# EAGLE board PwrGenBrd_v4 (EAGLE 7.6.0)
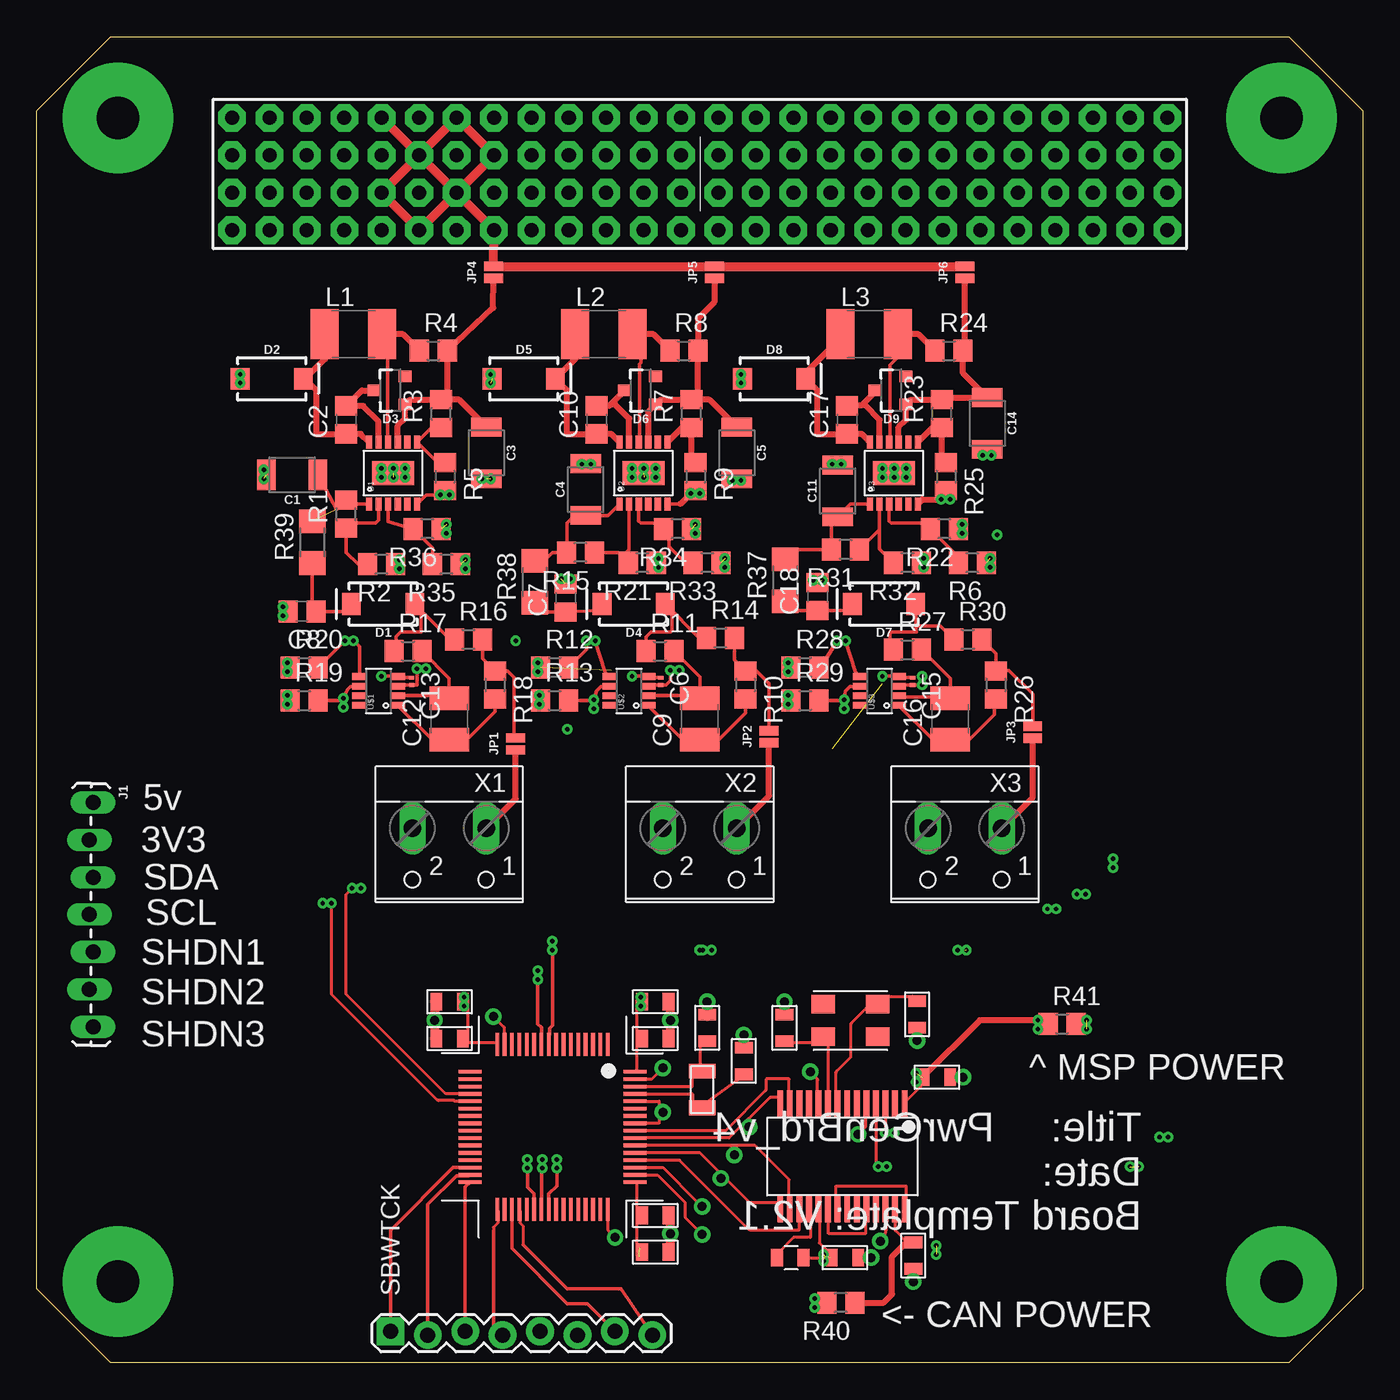
[diagram p0: board, top side]
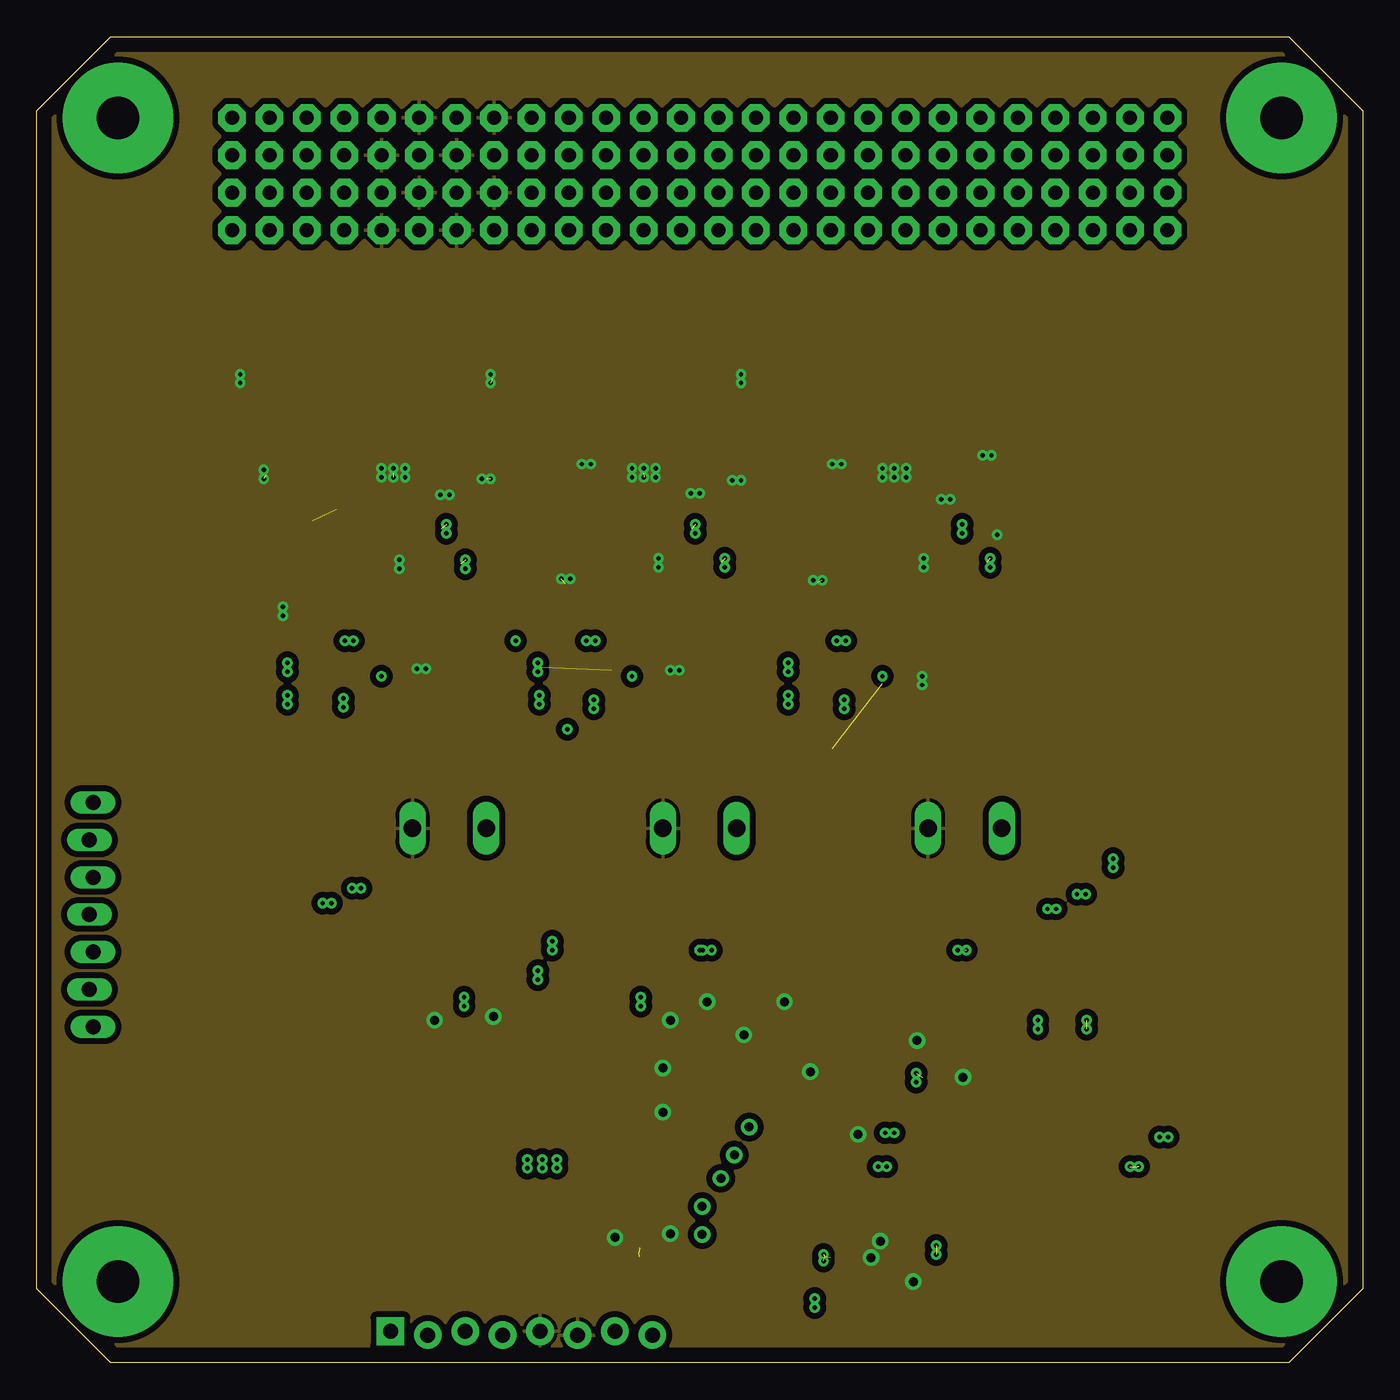
[diagram p1: board, inner layer GND]
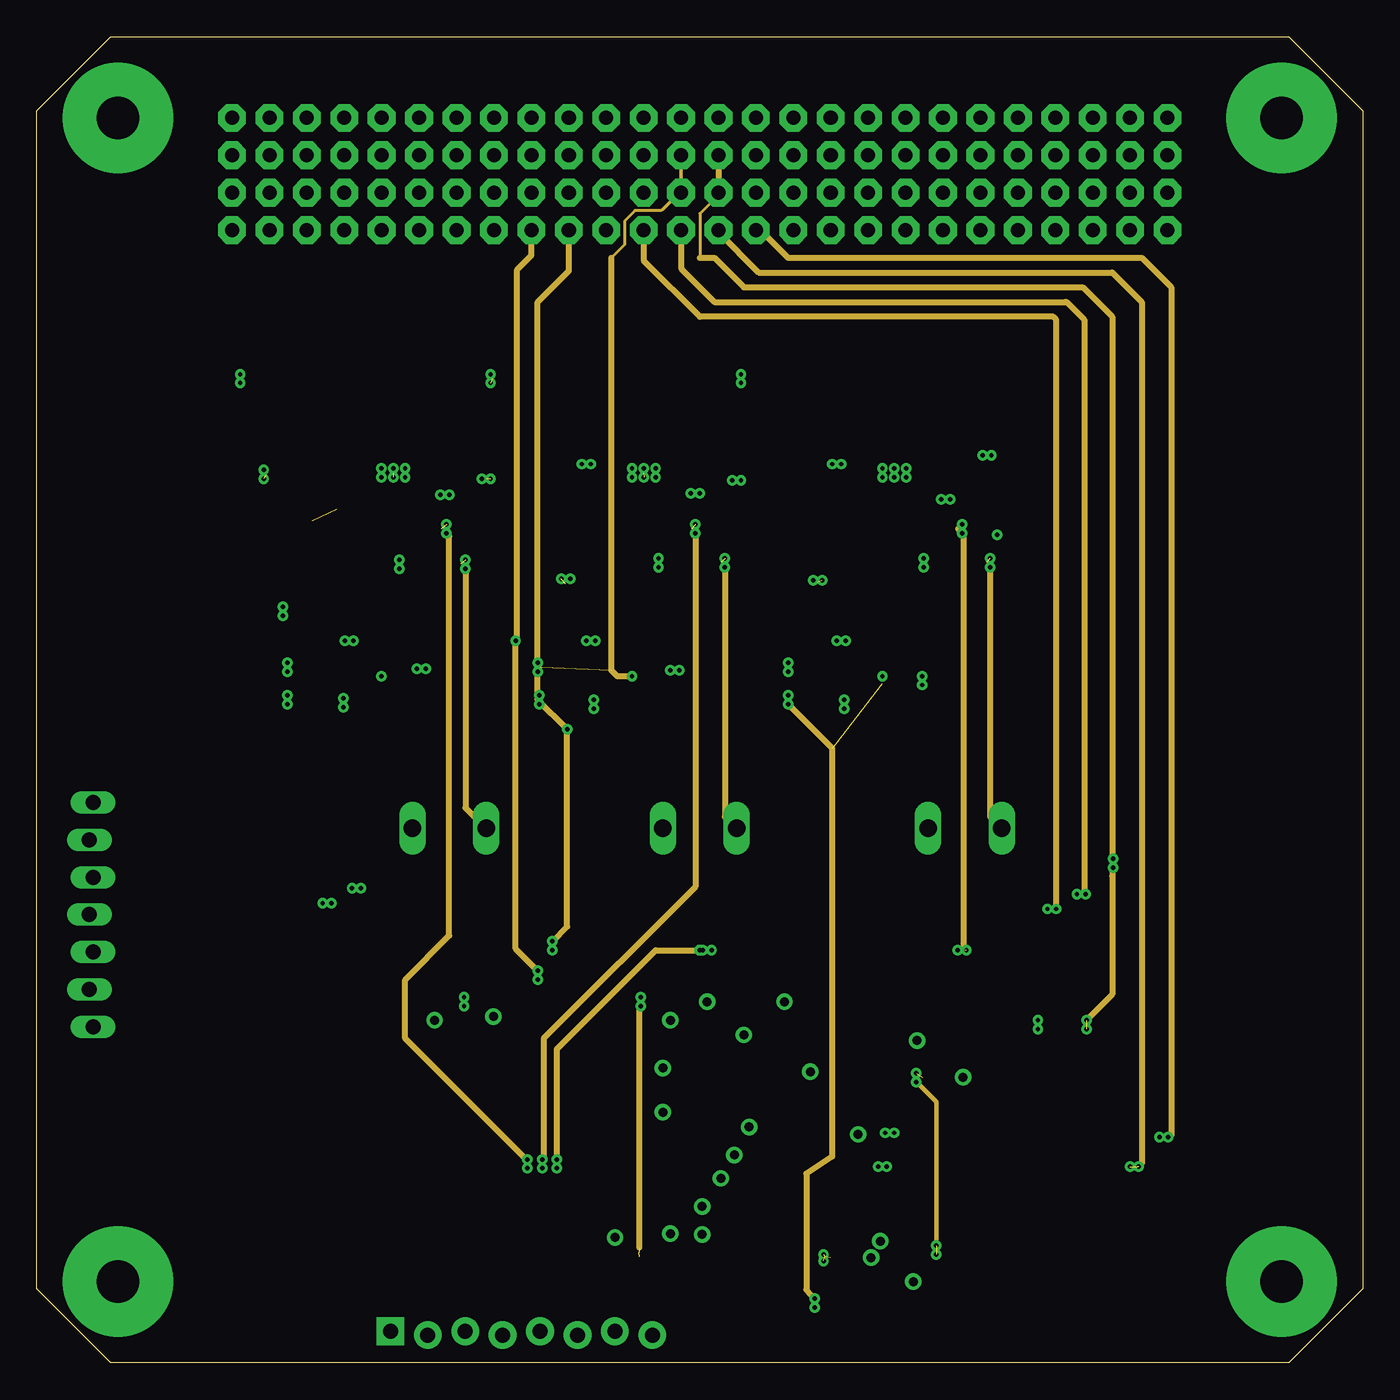
[diagram p2: board, inner layer TBD]
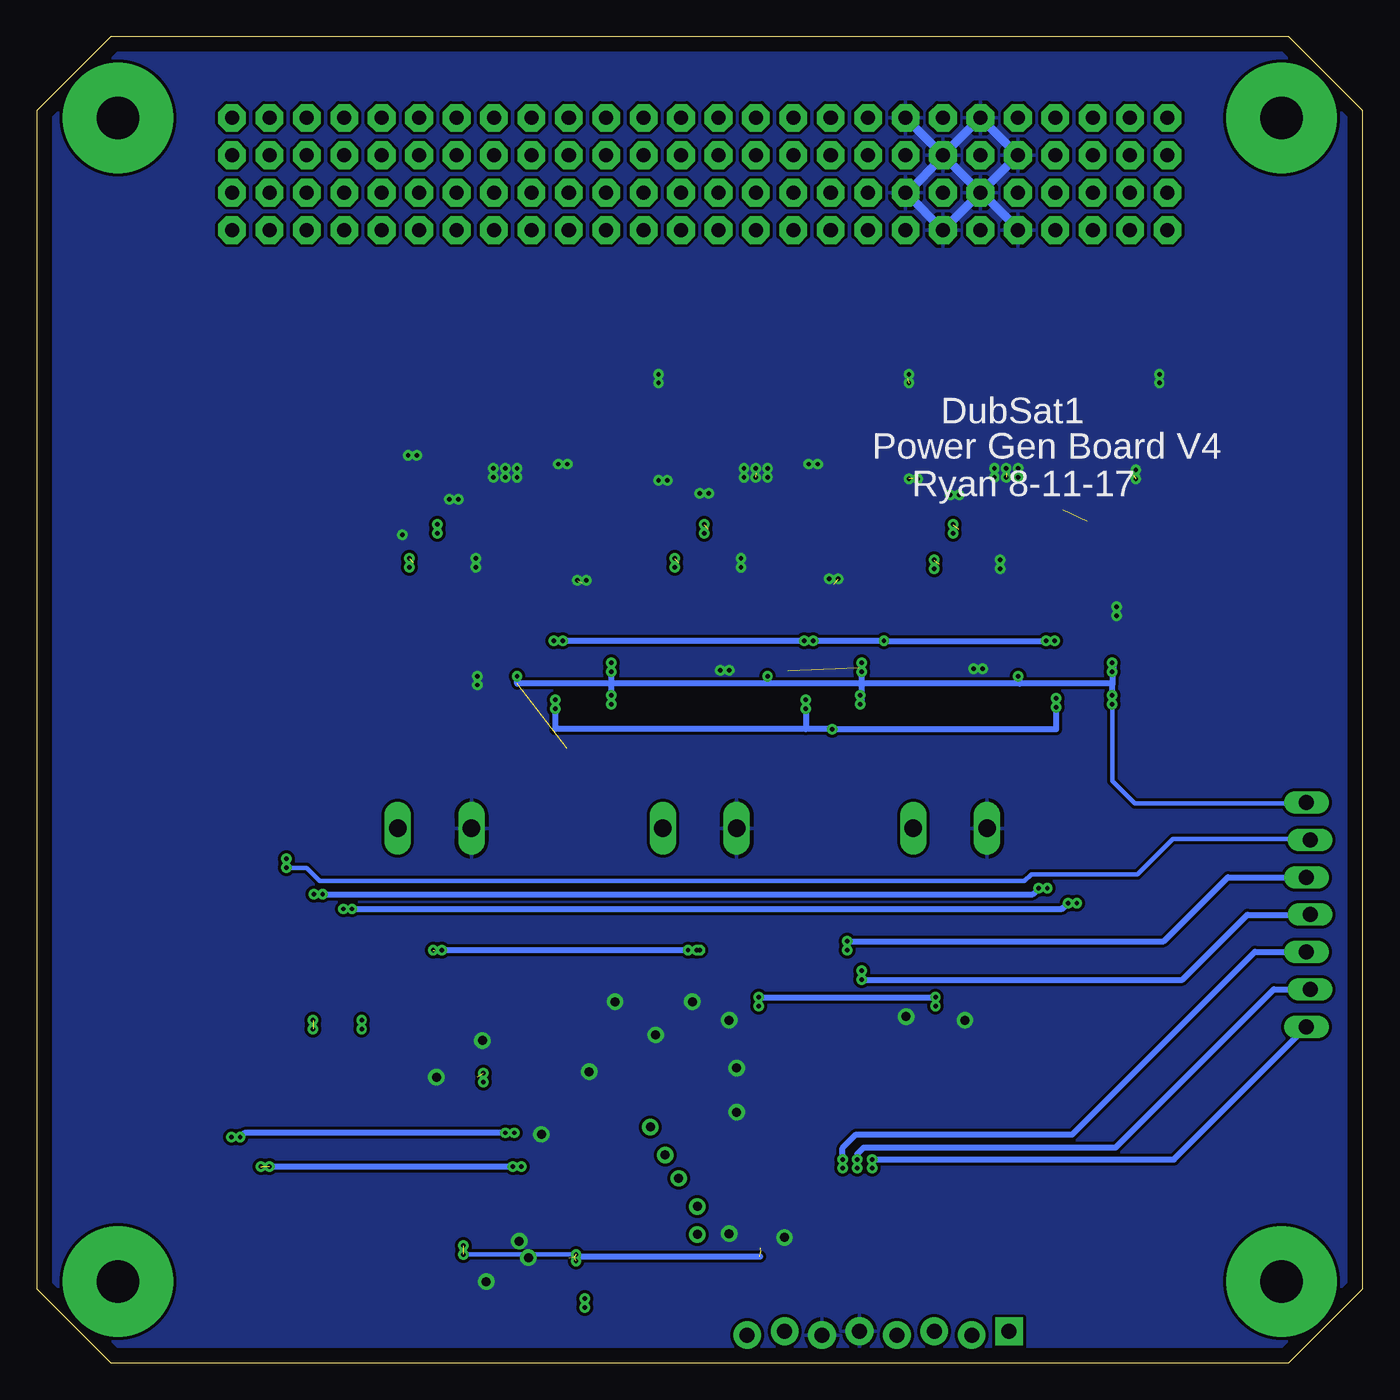
[diagram p3: board, bottom side, seen from below]

Size 90 x 90 mm. Coordinates in mm from the lower left corner, seen from the top.
Copper layers (1*2*3*16): Top 0.035mm / dielectric 1.5mm / GND 0.035mm / dielectric 0.15mm / TBD 0.035mm / dielectric 0.2mm / Bottom 0.035mm
Design rules "default *": minimum track width 10mil, minimum drill 24mil, track to track 8mil, track to pad 8mil, pad to pad 8mil, via to via 8mil, smd to smd 8mil, copper to edge 40mil, drill to drill 8mil, minimum pad ring 10mil, minimum via ring 8mil, stop-mask expansion 4mil, vias tented up to drill 0mil, thermal gap 10mil

## Footprints (pad centres in the part's own frame; a part is rotated, then mirrored left to right if it is on the bottom)
1210 = smd 1.27 x 2.06: 1 -1.755,0; 2 1.755,0
C0805 = smd 1.3 x 1.5: 1 -0.95,0; 2 0.95,0
C0201 = smd 0.25 x 0.35: 1 -0.25,0; 2 0.25,0
C1210 = smd 1.6 x 2.7: 1 -1.4,0; 2 1.4,0
SMA-DIODE = smd 1.27 x 1.47: A -2.15,0; C 2.15,0
SOT23-3 = smd 0.8 x 0.9: 1 -0.95,-1; 2 0.95,-1; 3 0,1.1
1X07_LOCK_LONGPADS = drill 1.016 long: 1 0,0.127; 2 2.54,-0.127; 3 5.08,0.127; 4 7.62,-0.127; 5 10.16,0.127; 6 12.7,-0.127; 7 15.24,0.127
SMT-JUMPER_2_NO_NO-SILK = smd 0.635 x 1.27: 1 -0.406,0; 2 0.406,0
L1812 = smd 1.9 x 3.4: 1 -1.95,0; 2 1.95,0
R0805 = smd 1.3 x 1.5: 1 -0.95,0; 2 0.95,0
R1206 = smd 1.6 x 1.803: 1 -1.422,0; 2 1.422,0
MSOP-12_GND = smd 0.889 x 0.42: 1 -2.1,1.625; 2 -2.1,0.975; 3 -2.1,0.325; 4 -2.1,-0.325; 5 -2.1,-0.975; 6 -2.1,-1.625; 7 2.1,-1.625; 8 2.1,-0.975; 9 2.1,-0.325; 10 2.1,0.325; 11 2.1,0.975; 12 2.1,1.625 | smd 1.651 x 2.845: 13 0,0
SO08 = smd 0.45 x 1: 1 -0.975,-1.3; 2 -0.325,-1.3; 3 0.325,-1.3; 4 0.975,-1.3; 5 0.975,1.3; 6 0.325,1.3; 7 -0.325,1.3; 8 -0.975,1.3
PC104_CONNECTOR = drill 0.953 pad 1.88 octagon: P$1 -31.75,31.88; P$2 -31.75,34.42; P$3 -31.75,36.96; P$4 -31.75,39.5; P$5 -29.21,31.88; P$6 -29.21,34.42; P$7 -29.21,36.96; P$8 -29.21,39.5; P$9 -26.67,31.88; P$10 -26.67,34.42; P$11 -26.67,36.96; P$12 -26.67,39.5; P$13 -24.13,31.88; P$14 -24.13,34.42; P$15 -24.13,36.96; P$16 -24.13,39.5; P$17 -21.59,31.88; P$18 -21.59,34.42; P$19 -21.59,36.96; P$20 -21.59,39.5; P$21 -19.05,31.88; P$22 -19.05,34.42; P$23 -19.05,36.96; P$24 -19.05,39.5; P$25 -16.51,31.88; P$26 -16.51,34.42; P$27 -16.51,36.96; P$28 -16.51,39.5; P$29 -13.97,31.88; P$30 -13.97,34.42; P$31 -13.97,36.96; P$32 -13.97,39.5; P$33 -11.43,31.88; P$34 -11.43,34.42; P$35 -11.43,36.96; P$36 -11.43,39.5; P$37 -8.89,31.88; P$38 -8.89,34.42; P$39 -8.89,36.96; P$40 -8.89,39.5; P$41 -6.35,31.88; P$42 -6.35,34.42; P$43 -6.35,36.96; P$44 -6.35,39.5; P$45 -3.81,31.88; P$46 -3.81,34.42; P$47 -3.81,36.96; P$48 -3.81,39.5; P$49 -1.27,31.88; P$50 -1.27,34.42; P$51 -1.27,36.96; P$52 -1.27,39.5; P$53 1.27,31.88; P$54 1.27,34.42; P$55 1.27,36.96; P$56 1.27,39.5; P$57 3.81,31.88; P$58 3.81,34.42; P$59 3.81,36.96; P$60 3.81,39.5; P$61 6.35,31.88; P$62 6.35,34.42; P$63 6.35,36.96; P$64 6.35,39.5; P$65 8.89,31.88; P$66 8.89,34.42; P$67 8.89,36.96; P$68 8.89,39.5; P$69 11.43,31.88; P$70 11.43,34.42; P$71 11.43,36.96; P$72 11.43,39.5; P$73 13.97,31.88; P$74 13.97,34.42; P$75 13.97,36.96; P$76 13.97,39.5; P$77 16.51,31.88; P$78 16.51,34.42; P$79 16.51,36.96; P$80 16.51,39.5; P$81 19.05,31.88; P$82 19.05,34.42; P$83 19.05,36.96; P$84 19.05,39.5; P$85 21.59,31.88; P$86 21.59,34.42; P$87 21.59,36.96; P$88 21.59,39.5; P$89 24.13,31.88; P$90 24.13,34.42; P$91 24.13,36.96; P$92 24.13,39.5; P$93 26.67,31.88; P$94 26.67,34.42; P$95 26.67,36.96; P$96 26.67,39.5; P$97 29.21,31.88; P$98 29.21,34.42; P$99 29.21,36.96; P$100 29.21,39.5; P$101 31.75,31.88; P$102 31.75,34.42; P$103 31.75,36.96; P$104 31.75,39.5
MSP-CAN_BLOCK = smd 1.2 x 0.8: 1 -6,6.08; 2 -6,7.88; 3 -8.5,6.08; 4 -8.5,7.88; 9 -8.5,-6.08; 10 -8.5,-7.88; 11 -6,-6.08; 12 -6,-7.88; 13 8.5,6.08; 14 8.5,7.88; 15 6,6.08; 16 6,7.88; 23 8.875,18.955; 24 8.875,20.755; 25 8.875,17.045; 26 8.875,15.245; 27 -3.375,25.205; 28 -3.375,27.005 | smd 1 x 0.25: 3.3V@CAN1 -3.375,25.125; 3.3V@CAN2 8.875,18.875; 3.3V@MSP1 8.501,5.884; 3.3V@MSP2 -8.533,-5.962; 3.3V_ANALOG@MSP2 -8.482,5.904 | smd 0.8 x 1.2: 5 -5.83,10.5; 6 -7.63,10.5; 7 -3.58,13; 8 -5.38,13; 17 -8.545,24.75; 18 -6.745,24.75; 19 -5.83,15.75; 20 -7.63,15.75; 21 7.83,24.5; 22 9.63,24.5 | smd 0.25 x 1: 5V 7.65,24.5 | smd 1.75 x 0.4: CANH -1.6,21.96; CANL -1.6,22.61; P$65 -1.6,23.91; P$66 -1.6,23.26; P$69 -1.6,21.31; P$70 -1.6,20.66; P$71 -1.6,20.01; P$72 -1.6,19.36; P$73 -1.6,18.71; P$74 -1.6,18.06; P$75 -1.6,17.41; P$76 -1.6,16.76; P$77 -1.6,16.11; P$78 -1.6,15.46; P$79 5.6,15.46; P$80 5.6,16.11; P$81 5.6,16.76; P$82 5.6,17.41; P$83 5.6,18.06; P$84 5.6,18.71; P$85 5.6,19.36; P$86 5.6,20.01; P$87 5.6,20.66; P$88 5.6,21.31; P$89 5.6,21.96; P$90 5.6,22.61; P$91 5.6,23.26; P$92 5.6,23.91 | drill 0.61: GND@1 -3.375,27.875; GND@2 -5.875,24.75; GND@3 -3.75,17.5; GND@4 0.5,20.75; GND@5 -8.5,15.75; GND@7 -8.5,10.5; GND@8 -7.25,8; GND@9 -4,7.5; GND@10 -1,7.5; GND@11 7.75,22.25; GND@12 10.5,24.5; GND@13 8.875,21.625; GND@14 7.25,8; GND@15 7.5,4.25; GND@16 -7.5,-4; GND@17 -7.25,-8; GND@26 -6.25,13; P2.4_SPI-CS2 5.397,10.16; P2.7_SPI-CS3 7.303,10.16; P5.4_SPI-MOSI 3.487,11.434; P5.5_SPI-MISO 1.9,12.354; P5.6_SPI-CLK 0,13.348 | smd 1.55 x 0.25: P1.0_A0 -5.6,3.75; P1.1_A1 -5.6,3.25; P1.2_A2 -5.6,2.75; P1.3_A3 -5.6,-1.75; P1.4_A4 -5.6,-2.25; P1.5_A5 -5.6,-2.75; P1.6_GPIO/PWM 5.6,-0.75; P1.7_GPIO/PWM 5.6,-0.25; P2.1_RXD 5.6,-3.75; P2.2_GPIO/PWM 5.6,-3.25; P3.0_A12 -5.6,2.25; P3.1_A13 -5.6,1.75; P3.2_A14 -5.6,1.25; P3.3_A15 -5.6,0.75; P3.4_GPIO_DEBUG 5.6,-2.75; P3.5_GPIO_DEBUG 5.6,-2.25; P3.6_GPIO/PWM 5.6,-1.75; P3.7_GPIO/PWM 5.6,-1.25; P5.0_I2C-SDA-1 5.6,0.25; P5.1_I2C-SCL-1 5.6,0.75; P7.0_I2C-SDA-2 -5.6,-0.25; P7.1_I2C-SCL-2 -5.6,-0.75; P$8 -5.6,0.25; P$11 -5.6,-1.25; P$15 -5.6,-3.25; P$16 -5.6,-3.75; P$43 5.6,1.25; P$44 5.6,1.75; P$45 5.6,2.25; P$46 5.6,2.75; P$47 5.6,3.25; P$48 5.6,3.75 | smd 0.25 x 1.55: P2.0_TXD 3.75,-5.6; P2.5_GPIO 1.75,-5.6; P2.6_GPIO/PWM 2.25,-5.6; P4.0_GPIO -0.25,-5.6; P4.1_GPIO 0.25,-5.6; P4.2_GPIO 0.75,-5.6; P4.3_GPIO 1.25,-5.6; P7.2_SYNC1 -1.75,-5.6; P7.3_GPIO -1.25,-5.6; P7.4_GPIO -0.75,-5.6; P$17 -3.75,-5.6; P$18 -3.25,-5.6; P$19 -2.75,-5.6; P$49 3.75,5.6; P$50 3.25,5.6; P$51 2.75,5.6; P$52 2.25,5.6; P$53 1.75,5.6; P$54 1.25,5.6; P$55 0.75,5.6; P$56 0.25,5.6; P$57 -0.25,5.6; P$58 -0.75,5.6; P$59 -1.25,5.6; P$60 -1.75,5.6; P$61 -2.25,5.6; P$62 -2.75,5.6; P$63 -3.25,5.6; P$64 -3.75,5.6; PJ.3_SYNC2 -2.25,-5.6; SBWTCK 2.75,-5.6; SBWTDIO 3.25,-5.6 | smd 1 x 1.8: P$93 -3.79,10.16; P$94 -1.29,10.16 | smd 1.25 x 1.6: P$104 -6.13,18.38; P$105 -6.13,22.08; P$106 -8.33,22.08; P$107 -8.33,18.38
BOARD_TEMPLATE_(V2.1) = drill 2.9 pad 7.5: P$1 -39.5,39.5; P$2 -39.5,-39.5; P$3 39.5,-39.5; P$4 39.5,39.5
1X08_CONNECTOR = drill 1.016 pad 1.88: 2 2.54,-0.127; 3 5.08,0.127; 4 7.62,-0.127; 5 10.16,0.127; 6 12.7,-0.127; 7 15.24,0.127; 8 17.78,-0.127 | drill 1.016 pad 1.88 square: SBWTCK 0,0.127
W237-102 = drill 1.194 long: 1 -2.5,-1.27; 2 2.5,-1.27

## Placement (x,y rotation side)
C1  10uF  [1210]  17.33,60.26 180 top
C2  1 uF  [C0805]  21,64 90 top
C3  10uF  [1210]  30.52,61.76 270 top
C4  10uF  [1210]  37.26,59.27 90 top
C5  10uF  [1210]  47.52,61.76 270 top
C6  0.1uF  [C0201]  42.35,46.25 270 top
C7  .1uF  [C0805]  35.9,51.9 90 top
C8  .1uF  [C0805]  18,51 180 top
C9  1uF  [C1210]  45,43.7 90 top
C10  1 uF  [C0805]  38,64 90 top
C11  10uF  [1210]  54.36,59.17 90 top
C12  1uF  [C1210]  28,43.7 90 top
C13  0.1uF  [C0201]  25.45,46.25 270 top
C14  10uF  [1210]  64.52,63.76 270 top
C15  0.1uF  [C0201]  59.45,46.25 270 top
C16  1uF  [C1210]  62,43.7 90 top
C17  1 uF  [C0805]  55,64 90 top
C18  .1uF  [C0805]  53,52 90 top
D1  [SMA-DIODE]  23.51,51.5 180 top
D2  [SMA-DIODE]  15.95,66.79 0 top
D3  [SOT23-3]  24,66 90 top
D4  [SMA-DIODE]  40.51,51.5 180 top
D5  [SMA-DIODE]  33.05,66.79 0 top
D6  [SOT23-3]  41,66 90 top
D7  [SMA-DIODE]  57.51,51.5 180 top
D8  [SMA-DIODE]  50.05,66.79 0 top
D9  [SOT23-3]  58,66 90 top
J1  [1X07_LOCK_LONGPADS]  3.69,38.03 270 top
JP1  JUMPER-SMT_2_NO_NO-SILK  [SMT-JUMPER_2_NO_NO-SILK]  32.5,42 90 top
JP2  JUMPER-SMT_2_NO_NO-SILK  [SMT-JUMPER_2_NO_NO-SILK]  49.7,42.5 90 top
JP3  JUMPER-SMT_2_NO_NO-SILK  [SMT-JUMPER_2_NO_NO-SILK]  67.6,42.8 90 top
JP4  JUMPER-SMT_2_NO_NO-SILK  [SMT-JUMPER_2_NO_NO-SILK]  31,74 90 top
JP5  JUMPER-SMT_2_NO_NO-SILK  [SMT-JUMPER_2_NO_NO-SILK]  46,74 90 top
JP6  JUMPER-SMT_2_NO_NO-SILK  [SMT-JUMPER_2_NO_NO-SILK]  63,74 90 top
L1  8.2uH  [L1812]  21.49,69.81 0 top
L2  8.2uH  [L1812]  38.49,69.81 0 top
L3  8.2uH  [L1812]  56.49,69.81 0 top
R1  ???k  [R0805]  21,57.6 90 top
R2  ???k  [R0805]  23.4,54.2 180 top
R3  549k  [R0805]  27.44,64.42 90 top
R4  0.05  [R0805]  26.92,68.69 0 top
R5  459k  [R0805]  27.72,60.14 270 top
R6  [R0805]  63.5,54.3 180 top
R7  549k  [R0805]  44.44,64.42 90 top
R8  0.05  [R0805]  43.92,68.69 0 top
R9  459k  [R0805]  44.72,60.14 270 top
R10  10  [R0805]  48.1,46 270 top
R11  10  [R0805]  42.3,48.3 0 top
R12  3.3k  [R0805]  35.15,47.2 0 top
R13  3.3k  [R0805]  35.15,44.95 0 top
R14  0.07  [R0805]  46.4,49.2 0 top
R15  ???k  [R0805]  36.9,55 180 top
R16  0.07  [R0805]  29.3,49.1 0 top
R17  10  [R0805]  25.2,48.3 0 top
R18  10  [R0805]  31.1,46 270 top
R19  3.3k  [R0805]  18.15,44.95 0 top
R20  3.3k  [R0805]  18.15,47.2 0 top
R21  ???k  [R0805]  41.1,54.3 180 top
R22  [R0805]  61.6,56.6 180 top
R23  549k  [R0805]  61.44,64.42 90 top
R24  0.05  [R0805]  61.92,68.69 0 top
R25  459k  [R0805]  61.72,60.14 270 top
R26  10  [R0805]  65.1,46 270 top
R27  10  [R0805]  59.1,48.4 0 top
R28  3.3k  [R0805]  52.15,47.2 0 top
R29  3.3k  [R0805]  52.15,44.95 0 top
R30  0.07  [R0805]  63.2,49.1 0 top
R31  ???k  [R0805]  54.9,55.2 180 top
R32  ???k  [R0805]  59.1,54.3 180 top
R33  [R0805]  45.5,54.3 180 top
R34  [R0805]  43.5,56.6 180 top
R35  [R0805]  27.8,54.2 180 top
R36  [R0805]  26.5,56.6 180 top
R37  Farritebead  [R1206]  50.8,53.1 90 top
R38  Ferritebead  [R1206]  33.8,53 90 top
R39  Ferritebead  [R1206]  18.7,55.7 90 top
R40  ???k  [R0805]  54.58,4.07 180 top
R41  ???k  [R0805]  69.6,22.99 0 top
U1  LT3652  [MSOP-12_GND]  24.18,60.39 90 top
U2  LT3652  [MSOP-12_GND]  41.18,60.39 90 top
U3  LT3652  [MSOP-12_GND]  58.18,60.39 90 top
U$1  INA219  [SO08]  23.2,45.6 90 top
U$2  INA219  [SO08]  40.2,45.6 90 top
U$3  INA219  [SO08]  57.2,45.6 90 top
U$4  PC104_CONNECTOR  [PC104_CONNECTOR]  45,45 0 top
U$5  MSP-CAN_BLOCK  [MSP-CAN_BLOCK]  35,16 270 top
U$6  BOARD_TEMPLATE_(V2.1)  [BOARD_TEMPLATE_(V2.1)]  45,45 0 top
U$8  PROGRAM/DEBUG_PORT  [1X08_CONNECTOR]  24,2 0 top
X1  [W237-102]  28,35 180 top
X2  [W237-102]  45,35 180 top
X3  [W237-102]  63,35 180 top

## Library data of the parts
C1 C3-C5 C11 C14 = SparkFun-Capacitors; PROD_ID: CAP-09824
C2 C6-C10 C12 C13 C15-C18 L1-L3 R1-R41 = rcl
D1 D2 D4 D5 D7 D8 = SparkFun-DiscreteSemi; PROD_ID: DIO-09886
D3 D6 D9 = SparkFun-DiscreteSemi; PROD_ID: DIO-08411
J1 = SparkFun-Connectors
JP1-JP6 = SparkFun-Jumpers
U1-U3 = SparkFun-IC-Power
U$1-U$3 = User-Submitted
U$4 U$5 U$8 = CubeSat(V2.4)
U$6 = CubeSat(V2.2)
X1-X3 = con-wago-500; MPN: 237-102; OC_FARNELL: unknown; OC_NEWARK: 70K9898

## Nets
3.3VMSP: J1.2 R41.2 U$4.P$54 U$4.P$55
3.3VMSP_MSP: R41.1 U$5.3.3V@CAN1 U$5.3.3V@CAN2 U$5.3.3V@MSP1 U$5.3.3V@MSP2 U$5.3.3V_ANALOG@MSP2
BATT: C3.1 D3.1 JP4.1 R3.2 R4.2 U1.9
BATT1: C5.1 D6.1 JP5.1 R7.2 R8.2 U2.9
BATT2: C14.1 D9.1 JP6.1 R23.2 R24.2 U3.9
BOOST: C2.2 D3.3 U1.11
BOOST1: C10.2 D6.3 U2.11
BOOST2: C17.2 D9.3 U3.11
CANH: U$4.P$53 U$5.CANH
CANL: U$4.P$57 U$5.CANL
GND: C1.2 C3.2 C4.2 C5.2 C6.2 C7.2 C8.2 C11.2 C13.2 C14.2 C15.2 C18.2 D2.A D5.A D8.A R2.1 R5.2 R9.2 R21.1 R25.2 R32.1 U1.6 U1.13 U2.6 U2.13 U3.6 U3.13 U$1.3 U$2.3 U$3.3 U$4.P$17 U$4.P$19 U$4.P$22 U$4.P$24 U$4.P$25 U$4.P$27 U$4.P$30 U$4.P$32 U$5.GND@1 U$5.GND@2 U$5.GND@3 U$5.GND@4 U$5.GND@5 U$5.GND@7 U$5.GND@8 U$5.GND@9 U$5.GND@10 U$5.GND@11 U$5.GND@12 U$5.GND@13 U$5.GND@14 U$5.GND@15 U$5.GND@16 U$5.GND@17 U$5.GND@26 U$8.5 U$8.6 X1.2 X2.2 X3.2
IN+: C12.1 R18.2 U$1.1
IN+1: C9.1 R10.2 U$2.1
IN+2: C16.1 R26.2 U$3.1
IN++: JP1.2 R16.2 R18.1
IN++1: JP2.2 R10.1 R14.2
IN++2: JP3.2 R26.1 R30.2
IN-: C12.2 R17.2 U$1.2
IN-1: C9.2 R11.2 U$2.2
IN-2: C16.2 R27.2 U$3.2
IN--: D1.A R16.1 R17.1
IN--1: D4.A R11.1 R14.1
IN--2: D7.A R27.1 R30.1
N$2: R6.2 R22.2 U3.3
N$3: U$4.P$101
N$4: U$4.P$97
N$5: U$4.P$93
N$6: U$4.P$89
N$8: U$4.P$61
N$9: U$4.P$90
N$10: U$4.P$98
N$11: U$4.P$103
N$12: U$4.P$102
N$13: U$4.P$94
N$14: U$4.P$99
N$15: U$4.P$91
N$16: U$4.P$95
N$17: U$4.P$92
N$18: U$4.P$96
N$19: U$4.P$100
N$20: U$4.P$104
N$21: C8.1 D1.C R39.1
N$22: C7.1 D4.C R38.1
N$23: R33.2 R34.2 U2.3
N$24: C18.1 D7.C R37.1
N$26: R35.2 R36.2 U1.3
P2.0TXD: U$5.P2.0_TXD U$8.3
P2.1RXD: U$5.P2.1_RXD U$8.4
P3.4GPIO: U$5.P3.4_GPIO_DEBUG U$8.7
P3.5GPIO: U$5.P3.5_GPIO_DEBUG U$8.8
PNL1: JP1.1 R35.1 X1.1
PNL2: JP2.1 R33.1 X2.1
PNL3: JP3.1 R6.1 X3.1
SBWTCK: U$5.SBWTCK U$8.SBWTCK
SBWTDIO: U$5.SBWTDIO U$8.2
SCL: J1.4 R12.2 R20.2 R28.2 U$1.5 U$2.5 U$3.5 U$4.P$33 U$5.P7.1_I2C-SCL-2
SDA: J1.3 R13.2 R19.2 R29.2 U$1.6 U$2.6 U$3.6 U$4.P$37 U$5.P7.0_I2C-SDA-2
SENSE: L1.2 R4.1 U1.10
SENSE1: L2.2 R8.1 U2.10
SENSE2: L3.2 R24.1 U3.10
SHDN1: J1.7 R36.1 U$5.P3.7_GPIO/PWM
SHDN2: J1.6 R34.1 U$5.P1.6_GPIO/PWM
SHDN3: J1.5 R22.1 U$5.P1.7_GPIO/PWM
SW: C2.1 D2.C L1.1 U1.12
SW1: C10.1 D5.C L2.1 U2.12
SW2: C17.1 D8.C L3.1 U3.12
SYNC1: U$4.P$45 U$5.P7.2_SYNC1
SYNC2: U$4.P$49 U$5.PJ.3_SYNC2
VBATT: JP4.2 JP5.2 JP6.2 U$4.P$18 U$4.P$20 U$4.P$21 U$4.P$23 U$4.P$26 U$4.P$28 U$4.P$29 U$4.P$31
VFB: R3.1 R5.1 U1.7
VFB1: R7.1 R9.1 U2.7
VFB2: R23.1 R25.1 U3.7
VIN: C1.1 R1.2 R39.2 U1.1
VIN1: C4.1 R15.2 R38.2 U2.1
VIN2: C11.1 R31.2 R37.2 U3.1
VIN_REG: R1.1 R2.2 U1.2
VIN_REG1: R15.1 R21.2 U2.2
VIN_REG2: R31.1 R32.2 U3.2
VS: C6.1 C13.1 C15.1 J1.1 R12.1 R13.1 R19.1 R20.1 R28.1 R29.1 R40.2 U$1.4 U$2.4 U$3.4 U$4.P$50 U$4.P$51
VS_MSP: R40.1 U$5.5V

## Tracks (layer width: path | path; a pad name or v marks a point on that pad's centre or on a via)
3.3VMSP  (via drill 0.3)  (1 unrouted)
  Top 0.406: v71.25,23.25 70.8,23.25 R41.2
  TBD 0.2: U$4.P$54 46.27,79.27 45,78 45,75
  TBD 0.305: 73,33.02 73,33.55 v73.05,33.6
  TBD 0.406: U$4.P$55 U$4.P$54 | 45,75 46,75 48,73 71,73 73,71 73,33.02 73,25 v71.25,23.25
  Bottom 0.305: J1.2 3.62,35.55 12.9,35.55 15.3,33.15 22.5,33.15 22.95,32.7 70.8,32.7 71.7,33.6 v73.05,33.6 v73.05,34.2
  other vias: 71.25,22.65
3.3VMSP_MSP  (via drill 0.3)  (7 unrouted)
  Top 0.254: v41,24.2 40.9,24.3 U$5.3.3V_ANALOG@MSP2 41,24.58 v41,24.8 | v29,24.2 29.04,24.24 U$5.3.3V@MSP2 29.04,24.76 v29,24.8 | 53.9,6.8 53.88,6.83 U$5.3.3V@CAN2 | 40.9,7.48 U$5.3.3V@MSP1
  Top 0.305: v59.7,19.05 59.8,19.05 U$5.3.3V@CAN1
  Top 0.406: v67.95,23.25 64,23.25 U$5.3.3V@CAN1 | v67.95,23.25 v67.95,22.65 | R41.1 68.21,22.99 v67.95,23.25
  TBD 0.305: v61.05,7.35 61.05,17.7 v59.7,19.05
  TBD 0.406: 40.9,7.8 40.9,24.1 v41,24.2
  Bottom 0.305: v53.4,7.35 v61.05,7.35
  Bottom 0.406: 40.9,7.2 53.5,7.2 | v41,24.8 v29,24.8
  other vias: 53.4,6.9 59.7,19.65 61.05,7.95
BATT
  Top 0.406: JP4.1 30.98,71.6 R4.2 27.87,65.8 R3.2 | R3.2 25.32,65.37 D3.1 25,64.1 24.5,63.6 U1.9 | C3.1 28.66,65.37 R3.2
BATT1
  Top 0.406: JP5.1 46,72 44.87,70.87 R8.2 44.87,65.8 R7.2 | U2.9 41.51,64.56 D6.1 42.32,65.37 R7.2 | C5.1 45.66,65.37 R7.2
BATT2
  Top 0.406: JP6.1 63,68.82 R24.2 62.87,67.16 C14.1 61.59,65.52 R23.2 59.32,65.37 D9.1 59,64 58.5,63.5 U3.9
BOOST
  Top 0.254: U1.11
  Top 0.406: D3.3 22.05,66 C2.2 22.15,64.95 23.2,63.9 U1.11
BOOST1
  Top 0.406: D6.3 38.95,65.05 | 38.95,65.05 38.85,64.95 C10.2 | U2.11 40.2,64.1 39.25,65.05 38.95,65.05
BOOST2
  Top 0.406: C17.2 55.05,65 56,65 | 56,65 56.9,65.9 D9.3 | U3.11 57.2,64 56.2,65 56,65
CANH  (via drill 0.3)  (2 unrouted)
  Top 0.2: U$5.CANH 56.96,13.44 v57.1,13.3
  Top 0.254: v57.1,13.3 v57.7,13.3
  TBD 0.406: U$4.P$53 46.27,76.73 49,74 73,74 75,72 75,13.5 v74.8,13.3
  Bottom 0.406: v57.7,13.3 74.7,13.3 74.8,13.2
  other vias: 74.2,13.3 74.2,13.3
CANL  (via drill 0.3)
  Top 0.2: U$5.CANL v57.61,15.61 v57.6,15.6
  Top 0.254: v57.6,15.6 v58.2,15.6 | v76.2,15.3 v76.8,15.3
  TBD 0.406: U$4.P$57 49.12,76.88 51,75 75,75 77,73 77,15.4 76.9,15.3 v76.8,15.3
  Bottom 0.406: v58.2,15.6 75.9,15.6 v76.2,15.3
GND  (via drill 0.3)  (7 unrouted)
  Top 0.254: U$1.3 24.57,46 C13.2 25.8,46 v25.8,47.1 | U$2.3 41.58,46 C6.2 42.7,46 43,46.3 v43,47 | U$3.3 58.58,46 C15.2 v60.1,46 | 13.8,66.89 v13.8,67.1 D2.A | v27.4,58.9 27.69,59.19 R5.2 | v27.4,58.9 27.5,59 28,59 | U1.6 26.41,58.9 v27.4,58.9 | U2.6 43.69,58.29 | v42.2,54 v42.2,54.6 42.05,54.45 R21.1 42,54.25 42,54 | v47.8,59.9 47.7,60.01 C5.2 | v47.8,66.5 47.9,66.6 D8.A | v64.8,61.6 64.52,61.88 C14.2 | v37,61 37.02,61.02 C4.2 | v54.6,61 54.52,60.92 C11.2 | v35.6,53.2 v36.2,53.2 | v53.3,53.1 v52.7,53.1 | v16.7,51.3 v16.7,50.7 16.75,50.7 C8.2 | v24.6,54.5 24.6,54.45 R2.1
  Top 0.406: v44.4,59 43.69,58.29 | v45,59 44.81,59.19 R9.2 | R25.2 62,58.91 v62,58.6 | U3.6 60.12,58.6 v61.4,58.6 | U3.13 58.49,60.7 v59,60.7 | R32.1 60.2,54.3 v60.2,54
  Bottom 0.61: U$4.P$25 30.95,79.34 30.95,79.4 28.44,81.91 28.44,81.95 | U$4.P$22 U$4.P$27 31.06,84.53 31.06,84.56 | U$4.P$22 25.86,79.42 23.37,76.93 23.37,76.83 | U$4.P$22 28.46,76.91 28.57,76.91 | 28.59,76.91 28.57,76.91 | 28.57,76.91 28.39,77.09 28.39,77.15 | U$4.P$22 U$4.P$19 | U$4.P$19 23.32,81.97 | U$4.P$19 25.86,84.41 25.95,84.41 | U$4.P$24 28.28,82.17 28.28,82.07
  other vias: 65.2,56.2 65.2,56.2 54,61 54,61 57.4,60.1 57.4,60.1 57.4,60.7 57.4,60.7 59,60.1 59,60.1 58.2,60.1 58.2,60.1 58.2,60.7 58.2,60.7 64.2,61.6 47.8,67.1 30.8,66.5 30.8,66.5 30.8,67.1 30.8,67.1 37.6,61 37.6,61 42,60.1 42,60.1 42,60.7 42,60.7 41.2,60.1 41.2,60.1 41.2,60.7 41.2,60.7 40.4,60.1 40.4,60.1 40.4,60.7 40.4,60.7 47.2,59.9 47.2,59.9 24.6,53.9 24.6,53.9 25,60.1 25,60.1 25,60.7 25,60.7 28,58.9 28,58.9 30.2,60 30.2,60 30.8,60 30.8,60 23.4,60.1 23.4,60.1 23.4,60.7 23.4,60.7 24.2,60.1 24.2,60.1 24.2,60.7 24.2,60.7 15.4,60 15.4,60 15.4,60.6 15.4,60.6 13.8,66.5 13.8,66.5 60.1,46.6 60.1,46.6 26.4,47.1 26.4,47.1 43.6,47 60.2,54.6 60.2,54.6
  pour GND (isolate 0.406): 0,90 90,90 90,0 0,0
  pour Bottom: 0,0 90,0 90,90 0,90
IN+
  Top 0.254: U$1.1 26.82,42.3 C12.1 29.2,42.3 31.1,44.2 R18.2
IN+1
  Top 0.254: U$2.1 43.83,42.3 C9.1 46.3,42.3 48.1,44.1 R10.2
IN+2
  Top 0.254: U$3.1 60.83,42.3 C16.1 63.3,42.3 65,44 65,44.95 R26.2
IN++
  Top 0.254: JP1.2 32.4,42.51 32.4,46.5 31.95,46.95 R18.1 30.25,47.8 R16.2
IN++1
  Top 0.254: R10.1 48.15,46.9 | R10.1 47.35,47.7 R14.2 | JP2.2 49.7,46.1 48.85,46.95 R10.1
IN++2
  Top 0.254: R30.2 65.1,48.15 R26.1 65.15,47 66,47 67.6,45.4 JP3.2
IN-
  Top 0.254: U$1.2 24.52,45.3 26.8,45.3 27,45.1 C12.2 28,46.45 R17.2
IN-1
  Top 0.254: R11.2 45,46.55 C9.2 44.5,45.1 44.3,45.3 41.52,45.3 U$2.2
IN-2
  Top 0.254: U$3.2 58.58,45.2 61.3,45.2 61.4,45.1 C16.2 62,46.45 R27.2
IN--
  Top 0.254: R17.1 24.4,48.45 24.4,49.3 24.7,49.6 26.1,49.6 26.1,51.1 25.7,51.5 D1.A 28.06,49.1 R16.1
IN--1
  Top 0.254: R14.1 44.96,49.2 D4.A 43.1,51.06 43.1,49.7 43,49.6 41.7,49.6 41.35,49.25 R11.1
IN--2
  Top 0.254: R27.1 57.9,48.65 57.9,49.6 59.7,49.6 59.66,49.64 59.66,50 | 59.66,50 D7.A | R30.1 61.35,50 59.66,50
N$2
  Top 0.254: U3.3 57.86,57.14 58,57 60.25,57 R22.2 62.55,54.7 R6.2
N$21
  Top 0.254: D1.C 20.86,51 C8.1 18.7,51.25 R39.1
N$22
  Top 0.254: D4.C 37.91,51.05 C7.1 34.43,50.95 R38.1
N$23
  Top 0.254: U2.3 40.86,57.14 41,57 42.15,57 R34.2 42.9,56.25 42.9,55.4 44,54.3 R33.2
N$24
  Top 0.254: D7.C 54.91,51.05 C18.1 51.43,51.05 R37.1
N$26
  Top 0.254: U1.3 23.86,57.09 R36.2 26.85,55.3 R35.2
P2.0TXD
  Top 0.254: U$5.P2.0_TXD 29.08,11.93 U$8.3
P2.1RXD
  Top 0.2: U$5.P2.1_RXD 31.3,10.35 31.3,9.5 31,9.2 31,9
  Top 0.254: U$8.4 31,2.49 31,9
P3.4GPIO
  Top 0.254: U$8.7 37.37,4 36,4 32.25,7.75 U$5.P3.4_GPIO_DEBUG
P3.5GPIO
  Top 0.2: U$5.P3.5_GPIO_DEBUG 32.8,10.35 32.8,9.5 33,9.3 33,8
  Top 0.254: U$8.8 39.65,5 36,5 33,8
PNL1  (via drill 0.3)  (1 unrouted)
  Top 0.254: v29.1,54.5 v29.1,53.9
  Top 0.406: X1.1 32.5,38.27 JP1.1
  TBD 0.406: v29.1,53.9 29.1,37.67 X1.1
PNL2  (via drill 0.3)  (1 unrouted)
  Top 0.254: v46.7,54.6 v46.7,54
  Top 0.406: X2.1 49.7,38.47 JP2.1
  TBD 0.406: v46.7,54 46.7,37.07 X2.1
PNL3  (via drill 0.3)  (1 unrouted)
  Top 0.254: v64.7,54.6 v64.7,54
  Top 0.406: X3.1 67.6,38.37 JP3.1
  TBD 0.406: v64.7,54 64.7,37.07 X3.1
SBWTCK
  Top 0.254: U$8.SBWTCK 24,9 28.25,13.25 U$5.SBWTCK
SBWTDIO
  Top 0.254: U$5.SBWTDIO 29.35,12.7 28.5,12.7 26.54,10.74 U$8.2
SCL  (via drill 0.3)
  Top 0.254: R20.2 v20.9,49 v21.5,49 21.9,48.6 U$1.5 | U$2.5 38.58,46.9 v37.9,49 v37.3,49 37.3,48.4 R12.2 | U$3.5 55.58,46.9 v54.9,49 v54.3,49 53.4,47.5 R28.2 | U$5.P7.1_I2C-SCL-2 34.25,22.75 34,23 v34,26 v34,26.6
  TBD 0.406: v34,26.6 32.5,28.1 v32.5,49 32.6,49.1 32.6,74.2 33.57,75.17 U$4.P$33
  Bottom 0.406: v20.9,49 v32.5,49 v37.9,49 v54.3,49 | 20.8,49 v20.9,49 | v21.5,49 v20.9,49 | 54.8,49 v54.3,49 | v54.9,49 v54.3,49 | v34,26 12.23,26 7.82,30.41 J1.4
SDA  (via drill 0.3)
  Top 0.2: U$5.P7.0_I2C-SDA-2 34.8,21.65 34.8,22.3
  Top 0.254: R19.2 20.65,44.95 v20.8,44.5 v20.8,45.1 21.1,45.7 21.3,45.9 21.88,45.9 U$1.6 | U$2.6 38.88,45.9 38.3,45.9 38,45.6 v37.8,45 | v37.8,44.4 37.75,44.95 R13.2 | U$3.6 55.88,45.9 55.2,45.9 54.9,45.6 v54.8,45 v54.8,44.4 54.75,44.95 R29.2 | 34.8,22.3 34.8,22.7 35,22.9 v35,28 v35,28.6
  TBD 0.406: v35,28.6 36,29.6 v36,43 34,45 34,72 36.11,74.11 U$4.P$37
  Bottom 0.406: 37.8,43 v36,43 20.8,43 v20.8,44.5 v20.8,45.1 | 37.8,43 54.8,43 v54.8,44.4 v54.8,45 | 37.8,43 v37.8,44.4 v37.8,45 | v35,28.6 13.51,28.6 9.15,32.95 J1.3
SENSE
  Top 0.254: U1.10 23.8,62.55 23.8,69.2 24,69.4 24,69.81
  Top 0.406: R4.1 24.85,69.81 24,69.81 L1.2
SENSE1
  Top 0.254: U2.10 40.9,62.53 40.9,67.8 41,67.9 41,69.81
  Top 0.406: R8.1 41.85,69.81 41,69.81 L2.2
SENSE2
  Top 0.254: U3.10 57.9,62.53 57.9,67.7 59,68.8 59,69.81
  Top 0.406: R24.1 59.85,69.81 59,69.81 L3.2
SHDN1  (via drill 0.3)  (1 unrouted)
  Top 0.254: v27.8,56.9 v27.8,56.3 | v33.3,13.8 v33.3,13.2 33.3,11.9 33.75,11.45 U$5.P3.7_GPIO/PWM
  TBD 0.406: v27.8,56.3 28,56.1 28,29 25,26 25,22 33.2,13.8 v33.3,13.8
  Bottom 0.406: v33.3,13.8 12.81,13.8 J1.7
SHDN2  (via drill 0.3)  (1 unrouted)
  Top 0.254: v44.7,56.9 v44.7,56.3 | v34.3,13.8 v34.3,13.2 34.25,13.15 U$5.P1.6_GPIO/PWM
  TBD 0.406: v44.7,56.3 44.7,32.3 34.4,22 34.4,13.9 v34.3,13.8
  Bottom 0.406: v34.3,13.8 34.3,14.16 33.86,14.6 16.77,14.6 6.03,25.34 3.57,25.34 J1.6
SHDN3  (via drill 0.3)  (2 unrouted)
  Top 0.254: v62.8,56.3 v62.8,56.9 62.8,56.85 R22.1 | v35.3,13.8 v35.3,13.2 35.3,12 34.75,11.45 U$5.P1.7_GPIO/PWM | v45.2,28 v45.8,28 | v62.5,28 v63.1,28
  TBD 0.406: v35.3,13.8 35.3,21.3 42,28 v45,28 v45.2,28 v45.8,28 | R22.1 62.9,56.25 62.9,28.1 63,28
  Bottom 0.406: v45,28 v62.5,28 | v35.3,13.8 35.3,14.58 34.39,15.49 19.71,15.49 7.31,27.9 3.84,27.9 J1.5
SW
  Top 0.254: C2.1 20.95,63
  Top 0.406: U1.12 22,63.05 C2.1 | 20.95,63 19,63 19,66 18.21,66.79 | 18.21,66.79 D2.C | 18.21,66.79 19.54,68.12 L1.1
SW1
  Top 0.406: U2.12 38.99,63.05 C10.1 37.95,63 36,63 36,66 D5.C 36.54,68.13 L2.1
SW2
  Top 0.254: 53,66 D8.C
  Top 0.406: L3.1 54.54,69.54 52,67 53,66 53,63 54.95,63 C17.1 55.99,63.05 U3.12
SYNC1  (via drill 0.3)
  Top 0.2: U$5.P7.2_SYNC1 28.42,17.75 arc-45 28.3,17.8 27.3,17.8 arc-45 27.13,17.87 20,25 v20,31.2
  Top 0.254: v20,31.2 v19.4,31.2 | v68.6,30.8 v69.2,30.8
  TBD 0.406: U$4.P$45 41.19,74.81 45,71 69,71 69.13,70.87 arc-45 69.2,70.69 v69.2,30.8
  Bottom 0.406: v68.6,30.8 20.5,30.8 arc-45 20.33,30.87 v20,31.2
SYNC2  (via drill 0.3)
  Top 0.2: U$5.PJ.3_SYNC2 27.75,18.25 21,25 21,31.8 v21.4,32.2
  Top 0.254: v70.6,31.8 v71.2,31.8 | v21.4,32.2 v22,32.2
  TBD 0.406: U$4.P$49 43.73,74.38 arc45 43.8,74.2 46,72 69.8,72 arc-45 69.97,71.93 71.1,70.8 71.1,32.01 arc45 71.17,31.83 v71.2,31.8
  Bottom 0.406: v70.6,31.8 22.4,31.8 v22,32.2
VBATT
  Top 0.61: JP6.2 JP5.2 JP4.2 U$4.P$29 U$4.P$26 | U$4.P$26 U$4.P$31 U$4.P$28 U$4.P$23 | U$4.P$23 U$4.P$18 | U$4.P$26 U$4.P$21 23.47,79.36 23.47,79.37 | U$4.P$23 U$4.P$20 | U$4.P$23 U$4.P$26 28.54,79.42
VFB
  Top 0.254: R3.1 26.79,63.47 U1.7 27.2,61.09 R5.1
VFB1
  Top 0.406: R9.1 44.44,61.37 R7.1 43.78,63.47 U2.7
VFB2
  Top 0.406: R25.1 61.44,61.37 R23.1 60.78,63.47 U3.7
VIN  (1 unrouted)
  Top 0.254: U1.1 21.26,58.29 R1.2 20.36,57.91 C1.1
VIN1
  Top 0.254: 36.48,57.52 C4.1 | R38.2 34.42,54.42 35,55 R15.2 36,55.05 36,57 36.52,57.52 C4.1 | C4.1 38.78,57.52 U2.1
VIN2
  Top 0.254: 54.59,57.41 C11.1 | R37.2 51.48,55.2 R31.2 53.95,57.01 C11.1 | U3.1 55.23,58.29 C11.1
VIN_REG
  Top 0.254: U1.2 23.2,57.91 23.2,57.9 23.2,57.2 23,57 21.35,57 R1.1 21,55 21.8,54.2 R2.2
VIN_REG1
  Top 0.254: R15.1 39.45,55 39.73,54.73 | 39.73,54.73 R21.2 | U2.2 40.2,55.2 39.73,54.73
VIN_REG2
  Top 0.254: U3.2 57.2,56.55 | 57.2,56.55 R31.1 | 57.2,56.55 57.2,55.24 R32.2
VS  (via drill 0.3)  (2 unrouted)
  Top 0.254: C13.1 24.57,46.5 U$1.4 24.48,46.6 v23.4,46.6 | C6.1 41.58,46.5 U$2.4 41.48,46.6 v40.4,46.6 | C15.1 58.58,46.5 U$3.4 58.48,46.6 v57.4,46.6 | v17,45.3 17.2,45.1 R19.1 17.2,44.9 v17,44.7 | R20.1 17.2,47.1 v17,46.9 v17,47.5 | v34,47.5 v34,46.9 34.2,47.1 R12.1 | v34.1,45.3 34.2,45.2 R13.1 34.2,44.8 v34.1,44.7 | v51,44.7 51.2,44.9 R29.1 51.2,45.1 v51,45.3 | v51,46.9 51.2,47.1 R28.1 51.2,47.3 v51,47.5 51,47
  Top 0.406: R40.2 53.63,4.35 v52.8,4.35
  TBD 0.2: 42.5,78.3 42.4,78.2 40.6,78.2 39.9,77.5 39.9,75.9 39,75
  TBD 0.254: 42.5,78.3 43.62,79.42 U$4.P$50 U$4.P$51
  TBD 0.406: v34.1,44.7 34,44.6 | v40.4,46.6 39.4,46.6 39,47 39,75 | v51,44.7 54,41.7 54,14 52.23,12.83 52.23,4.95 v52.8,4.35 v52.8,3.75
  Bottom 0.305: v17,44.7 17,39.5 15.45,37.95 3.9,37.95 J1.1
  Bottom 0.406: v17,47.5 arc60 17,47 17,46 | v17,44.7 v17,45.3 17,46 | v51,44.7 v51,45.3 v51,46.9 v51,47.5 | v40.4,46.6 40.5,46.5 | 23.5,46.5 v23.4,46.6 23.3,46.6 23.3,46.1 | 17,46 17.1,46.1 23.3,46.1 | 23.3,46.1 34,46.1 | 34,46.1 57.4,46.1 v57.4,46.6 | v34.1,45.3 34,45.4 | 34,45.4 34,46.1 | 34,46.1 v34,46.9 v34,47.5 | v34.1,44.7 34,44.8 34,45.4
VS_MSP
  Top 0.406: R40.1 57.48,4.08 58.05,4.65 58.05,7.2 59.2,8.35 U$5.5V

## Text on the board
_tsilk: 5v | 3V3 | SDA | SCL | SHDN1 | SHDN2 | SHDN3 | ^ MSP POWER | <- CAN POWER
_bsilk: DubSat1 | Power Gen Board V4 | Ryan 8-11-17